# Altium PCB PCB1.PcbDoc
Units mil, origin at the board's own origin, x right, y up, seen from the top; angles counter-clockwise.
Board outline 2280 x 2275 mil, 2 copper layers (Top Layer, Bottom Layer); 42 components, 28 nets, 140 pads, 13 vias.
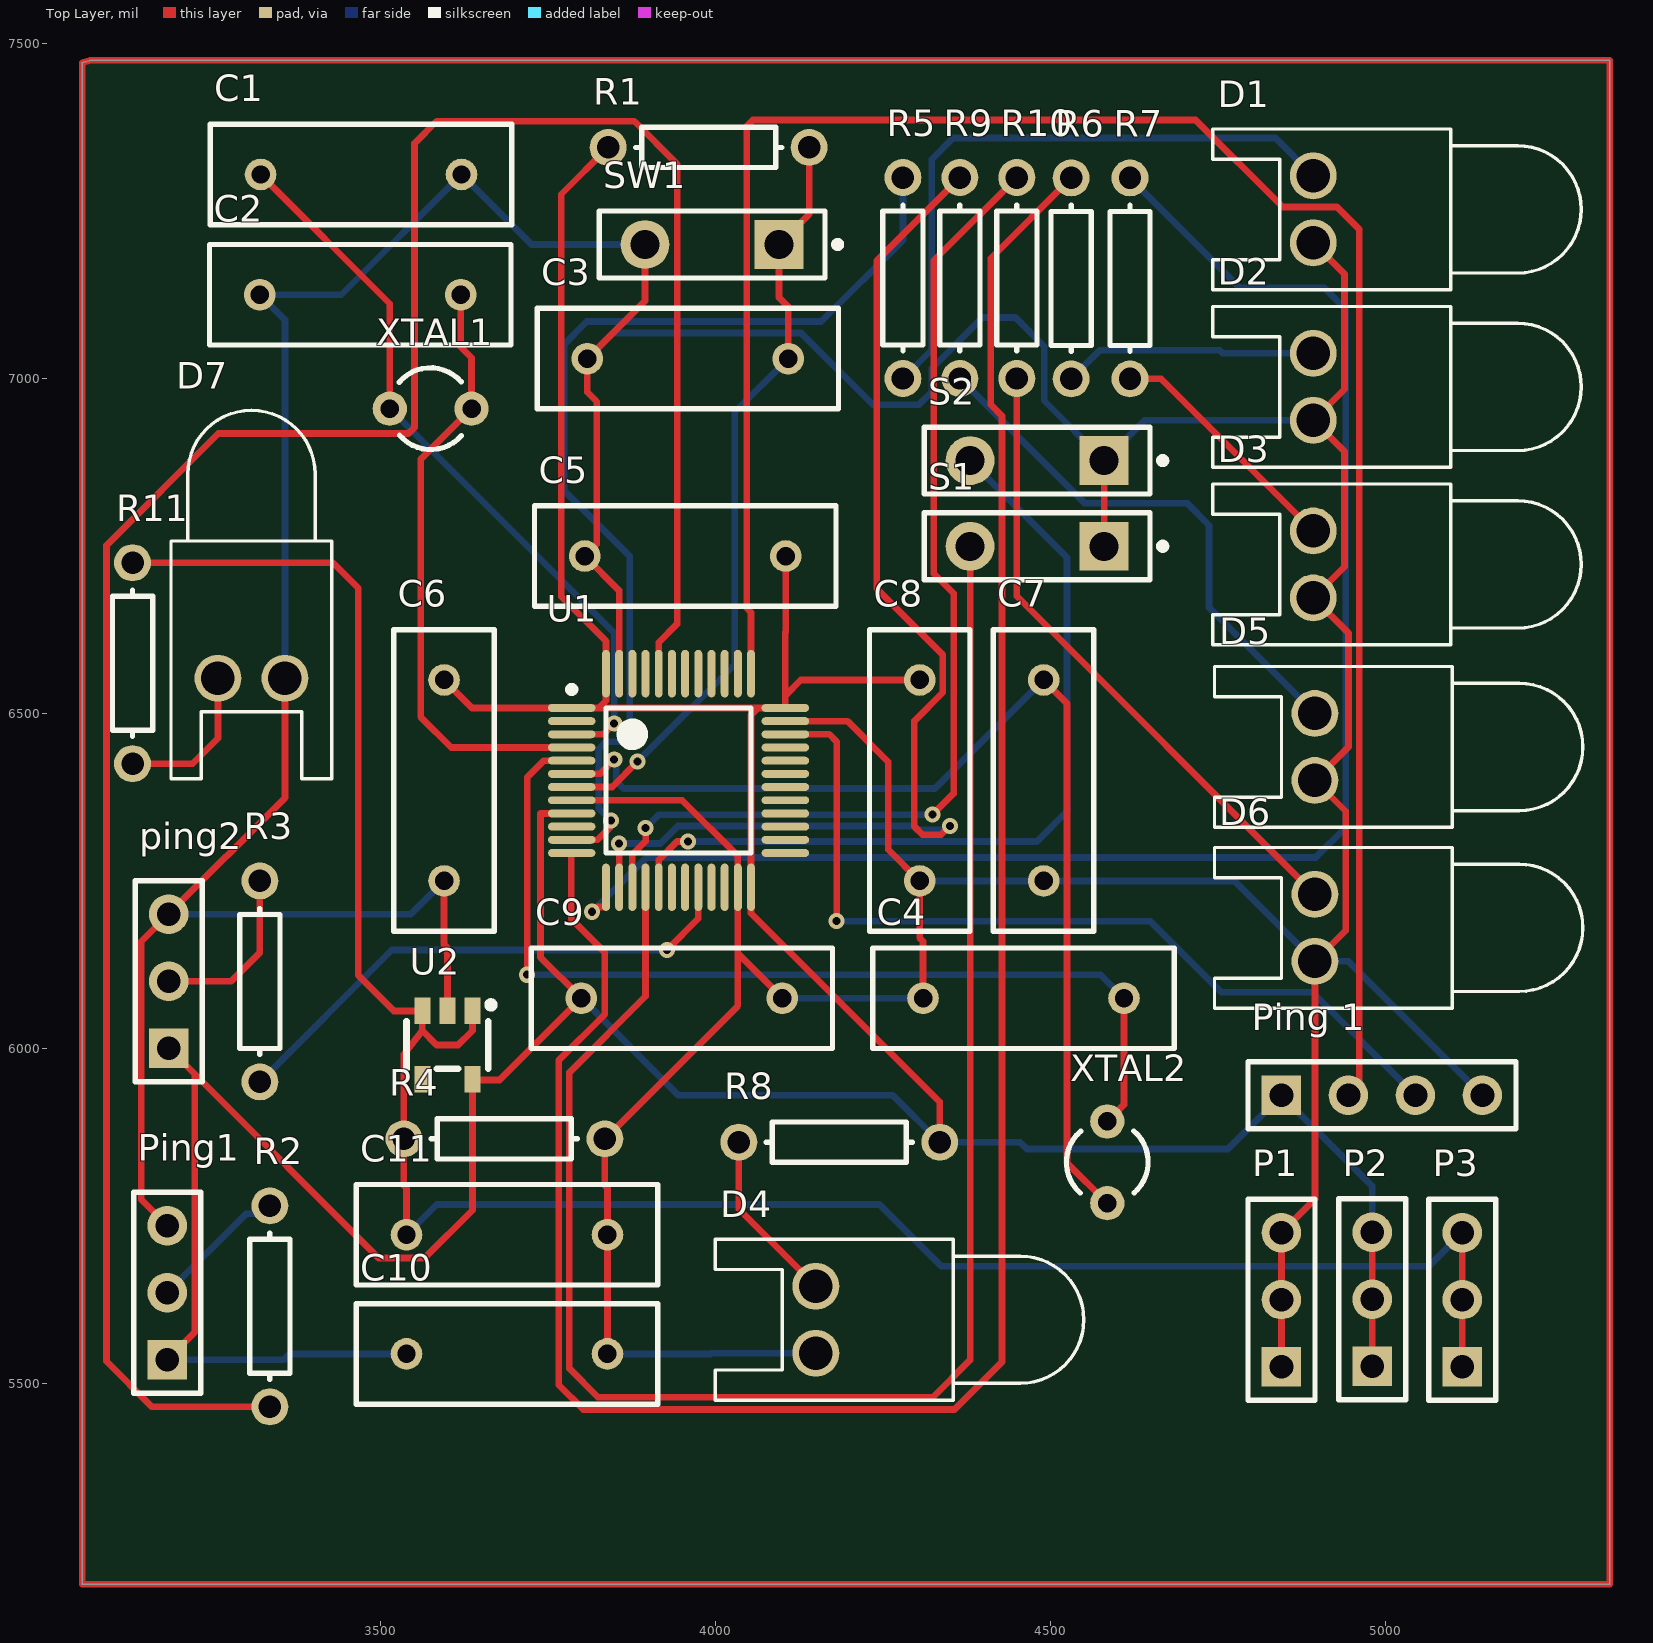
[diagram p0: Top Layer view]
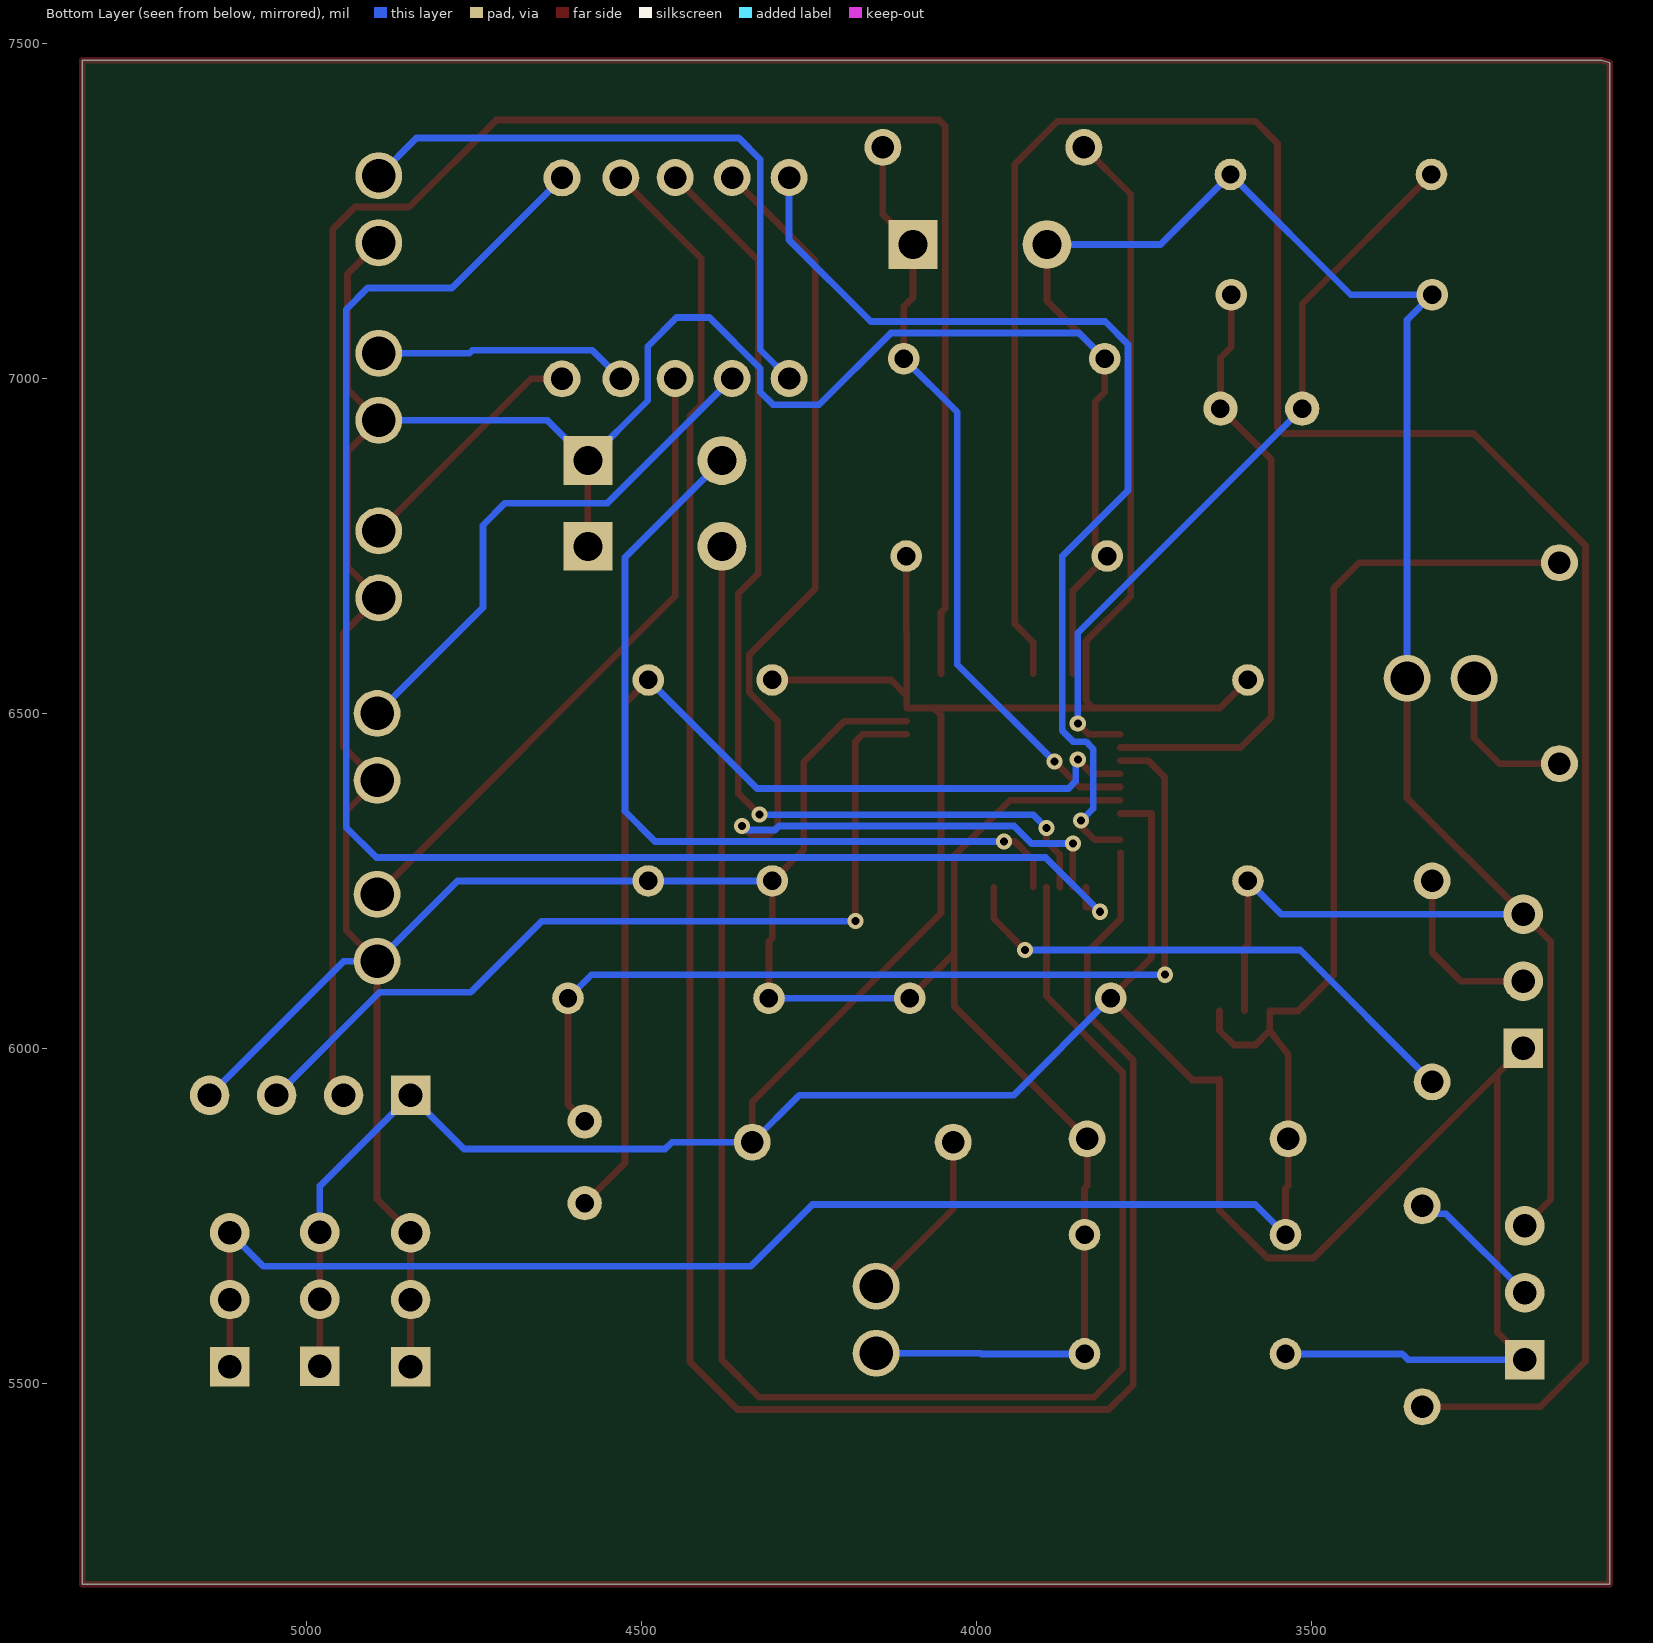
[diagram p1: Bottom Layer view, seen from below]

## Layer stack, top to bottom
Top Solder: solder mask 0.4, Solder Resist, Dk 3.5
Top Layer: signal copper 1.4
Dielectric 1: dielectric 12.6, FR-4, Dk 4.8
Bottom Layer: signal copper 1.4
Bottom Solder: solder mask 0.4, Solder Resist, Dk 3.5

## Board outline
3055,5200 3055,7471.07 3067.22,7475 5335,7475 5335,5200

## Design rules (kind name [scope] priority, off if disabled: settings)
Clearance [All] p1: gap=6 ignorepadtopadclearanceinfootprint=FALSE except(0: Arc-Hole Track-Hole SMDPad-Hole THPad-Hole Via-Hole Fill-Hole Poly-Hole Region-Hole Text-Hole)
PolygonConnect [All] p1: connectstyle=Relief reliefconductorwidth=10 reliefentries=4 polygonreliefangle="90 Angle" airgapwidth=10
RoutingVias [All] p1: holewidth=12 width=24 viastyle="Through Hole" minholewidth=12 minwidth=24 maxholewidth=12 maxwidth=24
SolderMaskExpansion [All] p1: expansion=4
Width Width_1 [All] p1: maxlimit=10 minlimit=10 preferedwidth=10
Width PWR [InNetClass('PWR')] p2: maxlimit=20 minlimit=10 preferedwidth=15 minimp=50.000000 maximp=50.000000 favimp=50.000000
30 further rules are at their usual default settings.

## Classes and differential pairs
net class PWR: 3V3 5V

## Components (designator, comment, footprint, x,y, rotation, side; value= is the part's Value field where it differs from the comment)
C1 "Cap" RAD-0.3 3471.06,7304.57 r0 top value=15pF
C2 "Cap" RAD-0.3 3470,7125 r0 top value=15pF
C3 "Cap" RAD-0.3 3958.94,7029.69 r180 top value=0.1pF
C4 "Cap" RAD-0.3 4460,6075 r180 top value=22pF
C5 "Cap" RAD-0.3 3955,6735 r0 top value=0.1uf
C6 "Cap" RAD-0.3 3595,6400 r90 top value=0.1uf
C7 "Cap" RAD-0.3 4490,6400 r90 top value=22pF
C8 "Cap" RAD-0.3 4305,6400 r90 top value=0.1uf
C9 "Cap" RAD-0.3 3950,6075 r180 top value=0.1uf
C10 "Cap" RAD-0.3 3688.94,5543.94 r180 top value=1uF
C11 "Cap" RAD-0.3 3688.94,5721.81 r180 top value=1uF
D1 "LED0" LED-0 4892.5,7252.5 r90 top
D2 "LED0" LED-0 4892.5,6987.5 r90 top
D3 "LED0" LED-0 4892.5,6722.5 r90 top
D4 "LED0" LED-0 4150,5595 r90 top
D5 "LED0" LED-0 4895,6450 r90 top
D6 "LED0" LED-0 4895,6180 r90 top
D7 "LED0" LED-0 3307.5,6552.5 r180 top
P1 "Header 3" HDR1X3 4845,5525 r90 top
P2 "Header 3" HDR1X3 4980.43,5525.43 r90 top
P3 "Header 3" HDR1X3 5115,5525 r90 top
Ping1 "Header 3" HDR1X3 3181.81,5535.43 r90 top
ping2 "Header 3" HDR1X3 3183.94,6000.43 r90 top
"Ping 1" "Header 4" HDR1X4 4845,5930 r0 top
R1 "Res1" AXIAL-0.3 3990,7345 r180 top value=1K
R2 "Res1" AXIAL-0.3 3335,5615 r90 top value=10k
R3 "Res3" AXIAL-0.3 3320,6100 r90 top value=10k
R4 "Res1" AXIAL-0.3 3685,5865 r180 top value=100K
R5 "Res1" AXIAL-0.3 4280,7150 r270 top value=10k
R6 "Res1" AXIAL-0.3 4531.06,7149.43 r270 top value=10k
R7 "Res1" AXIAL-0.3 4618.93,7149.43 r270 top value=10k
R8 "Res1" AXIAL-0.3 4185,5860 r180 top value=10k
R9 "Res1" AXIAL-0.3 4365,7150 r270 top value=10k
R10 "Res1" AXIAL-0.3 4450,7150 r270 top value=10k
R11 "Res1" AXIAL-0.3 3130,6575 r270 top value=10k
S1 "SW-PB" SPST-2 4480.31,6749.57 r180 top
S2 "SW-PB" SPST-2 4480.31,6877.45 r180 top
SW1 "SW-PB" SPST-2 3995,7200 r180 top
U1 "STM32F103C8T6" LQFP48_N 3945,6400 r0 top
U2 "RT9013-33GB" SOT-23-5_L3.0-W1.7-P0.95-LS2.8-BR 3600,6005 r90 top
XTAL1 "32.768k" R38 3575,6955 r270 top
XTAL2 "8M" R38 4585,5830 r180 top

## Footprints (in the part's own frame and the unit in brackets; to place one, negate y for a bottom-side part, rotate by r counter-clockwise, add the part's x,y. Pads: shape width x height; smd on the part's side, far side on the other; paste and mask are expansions set on the pad)
AXIAL-0.3 [mm] "Axial Device, Thru-Hole; 2 Leads; 0.3 in Pin Spacing"
  round 1.4 hole 0.85: 1(-3.81,0) 2(3.81,0)
  silkscreen extent -2.77,-0.76 2.77,0.76
HDR1X3 [mm] "Connector; Header; 3 Position"
  rect 1.5x1.5 hole 0.9: 1(0,0)
  round 1.5 hole 0.9: 2(2.54,0) 3(5.08,0)
  silkscreen extent -1.27,-1.27 6.35,1.27
HDR1X4 [mm] "Connector; Header; 4 Position"
  rect 1.5x1.5 hole 0.9: 1(0,0)
  round 1.5 hole 0.9: 2(2.54,0) 3(5.08,0) 4(7.62,0)
  silkscreen extent -1.27,-1.27 8.89,1.27
LED-0 [mil] "LED; 2 Leads"
  round 70 hole 50: 1(50,0) 2(-50,0)
  silkscreen extent -120,-400 120,150
LQFP48_N [mm] "Thin QFP, 48-Leads, Body 7x7mm, Pitch 0.5mm, IPC Medium Density"
  oval 1.8x0.3 smd: 1(-4.05,2.75) 2(-4.05,2.25) 3(-4.05,1.75) 4(-4.05,1.25) 5(-4.05,0.75) 6(-4.05,0.25) 7(-4.05,-0.25) 8(-4.05,-0.75) 9(-4.05,-1.25) 10(-4.05,-1.75) 11(-4.05,-2.25) 12(-4.05,-2.75) 25(4.05,-2.75) 26(4.05,-2.25) 27(4.05,-1.75) 28(4.05,-1.25) 29(4.05,-0.75) 30(4.05,-0.25) 31(4.05,0.25) 32(4.05,0.75) 33(4.05,1.25) 34(4.05,1.75) 35(4.05,2.25) 36(4.05,2.75)
  oval 0.3x1.8 smd: 13(-2.75,-4.05) 14(-2.25,-4.05) 15(-1.75,-4.05) 16(-1.25,-4.05) 17(-0.75,-4.05) 18(-0.25,-4.05) 19(0.25,-4.05) 20(0.75,-4.05) 21(1.25,-4.05) 22(1.75,-4.05) 23(2.25,-4.05) 24(2.75,-4.05) 37(2.75,4.05) 38(2.25,4.05) 39(1.75,4.05) 40(1.25,4.05) 41(0.75,4.05) 42(0.25,4.05) 43(-0.25,4.05) 44(-0.75,4.05) 45(-1.25,4.05) 46(-1.75,4.05) 47(-2.25,4.05) 48(-2.75,4.05)
  silkscreen extent -4.17,-2.75 2.75,3.57, body extent -3.5,-3.5 3.5,3.5, height 1.6
R38 [mm] "Crystal, Thru-Hole; 2 Leads; Body 3.1 x 8.2 mm (Dia.xH)"
  round 1.3 hole 0.7: 1(0,1.55) 2(0,-1.55)
  silkscreen extent -1.55,-1.19 1.55,1.17
RAD-0.3 [mm] "Radial Cap, Thru-Hole; 2 Leads; 0.3 in Pin Spacing"
  round 1.2 hole 0.7: 1(-3.81,0) 2(3.81,0)
  silkscreen extent -5.71,-1.9 5.72,1.91
SOT-23-5_L3.0-W1.7-P0.95-LS2.8-BR [mm]
  rect 1x0.6 smd: 1(1.3,-0.95) 2(1.3,0) 3(1.3,0.95) 4(-1.3,0.95) 5(-1.3,-0.95)
  silkscreen extent -0.9,-1.78 1.65,1.55
SPST-2 [mm] "Switch; 2 Leads"
  rect 1.85x1.85 hole 1.1: 1(-2.54,0)
  round 1.85 hole 1.1: 2(2.54,0)
  silkscreen extent -4.89,-1.27 4.28,1.27

## Part data
C1 C2 C3 C4 C5 C6 C7 C8 C9 C10 C11: "Capacitor", LatestRevisionDate=17-Jul-2002, LatestRevisionNote="Re-released for DXP Platform.", PackageDescription="Radial Cap, Thru-Hole; 2 Leads; 0.3 in Pin Spacing", PackageReference=RAD-0.3, Published=8-Jun-2000, Publisher="Altium Limited"
D1 D2 D3 D4 D5 D6 D7: "Typical INFRARED GaAs LED", LatestRevisionDate=08-Jul-2005, LatestRevisionNote="Mech Layer 1 removed.", PackageDescription="LED; 2 Leads", PackageReference=LED-0, Published=8-Jun-2000, Publisher="Altium Limited"
P1 P2 P3 Ping1 ping2: "Header, 3-Pin", LatestRevisionDate=17-Jul-2002, LatestRevisionNote="Re-released for DXP Platform.", Publisher="Altium Limited"
"Ping 1": "Header, 4-Pin", LatestRevisionDate=17-Jul-2002, LatestRevisionNote="Re-released for DXP Platform.", Publisher="Altium Limited"
R1 R2 R4 R5 R6 R7 R8 R9 R10 R11: "Resistor", LatestRevisionDate=17-Jul-2002, LatestRevisionNote="Re-released for DXP Platform.", PackageDescription="Axial Device, Thru-Hole; 2 Leads; 0.3 in Pin Spacing", PackageReference=AXIAL-0.3, Published=8-Jun-2000, Publisher="Altium Limited"
R3: library part Res1, "Resistor", LatestRevisionDate=17-Jul-2002, LatestRevisionNote="Re-released for DXP Platform.", PackageDescription="Axial Device, Thru-Hole; 2 Leads; 0.3 in Pin Spacing", PackageReference=AXIAL-0.3, Published=8-Jun-2000, Publisher="Altium Limited"
S1 S2 SW1: "Switch", LatestRevisionDate=17-Jul-2002, LatestRevisionNote="Re-released for DXP Platform.", PackageDescription="Switch; 2 Leads", PackageReference=SPST-2, Published=24-Mar-1999, Publisher="Altium Limited"
U1: "STM32 ARM-based 32-bit MCU with 64 Kbytes Flash, 48-pin LQFP, Industrial Temperature", ComponentLink1Description="Manufacturer Link", ComponentLink1URL=www.st.com/stm32, ComponentLink2Description=Datasheet, ComponentLink2URL=http://www.st.com/stonline/products/literature/ds/13587.pdf, DatasheetVersion="rev6, Mar-2008", PackageDescription="48-Pin Low-Profile Quad Flat Pack, 7 x 7 mm Body, 0.5 mm Pitch (LQFP48)", PackageReference=LQFP48, PackageVersion=Mar-2008, Published=30-May-2008, Publisher="Altium Limited"
U2: BOM_JLCPCB Part Class="Extended Part", BOM_Manufacturer=RICHTEK, BOM_Manufacturer Part=RT9013-33GB, BOM_Supplier=LCSC, BOM_Supplier Part=C47773, spicePre=U, spiceSymbolName=RT9013-33GB
XTAL1 XTAL2: library part XTAL, "Crystal Oscillator", LatestRevisionDate=17-Jul-2002, LatestRevisionNote="Re-released for DXP Platform.", PackageDescription="Crystal, Thru-Hole; 2 Leads; Body 3.1 x 8.2 mm (Dia.xH)", PackageReference=R38, Published=8-Jun-2000, Publisher="Altium Limited"

## Via types
v1: diameter 24, hole 12, Top Layer to Bottom Layer, 13 vias

## Nets (pads, with @x,y where several pads share a name; then routed paths per layer and width w, separated by ;. In a path a pad name is that pad's centre, name@x,y a point inside that pad or via, vN(x,y) a via of type N, cw(c..) or ccw(c..) an arc to the next point about the centre after c; other vN are vias at no path point)
3V3: "Ping 1.1" C5.2 C6.2 C8.2 C9.2 C10.2 P2.1 P2.2 P2.3 Ping1.1 ping2.1 R1.2 R8.1 U1.1 U1.9 U1.24 U1.36 U1.48 U2.5 | length 6435.7
  Top Layer w10: Ping1.1 3223,5576.61 3223,5961.36 ; ping2.1 3223,5961.36 ; C6.2 3636.73,6508.27 U1.1 3826,6508.27 ; U2.5 U2.5@3637.4,5953 ; U1.9 3739,6350.79 3739,6136 C9.2 3678,5953 U2.5@3637.4,5953 ; R1.2 3770,7275 3770,6674.73 3836.73,6608 U1.48 3836.73,6519 3826,6508.27 ; C5.2 4105,6621.55 4104.45,6621 4104.45,6527 ; C8.2 4127.45,6550 4104.45,6527 ; R8.1 4335,5920 4053.27,6201.73 U1.24 4053.27,6497.54 4064,6508.27 ; P2.1 P2.2 P2.3 ; 3223,5961.36 3497.36,5687 3566,5687 3637.4,5758.4 U2.5@3637.4,5953 ; 3826,6508.27 4064,6508.27 ; 4064,6508.27 U1.36 4104.45,6527
  Bottom Layer w10: Ping1.1 3356,5535.43 3364.51,5543.94 C10.2 ; C9.2 3945,5930 4265,5930 R8.1 4455,5860 4465,5850 4765,5850 4845,5930 4980.43,5794.57 P2.3
5V: C11.2 P3.1 P3.2 P3.3 R4.2 R11.1 U2.1 U2.3 | length 3369.7
  Top Layer w10: R11.1 3429,6725 3467,6687 3467,6109 3520,6056 U2.3@3562.6,6056 ; C11.2 3538.94,5791 3535,5794.94 R4.2 3535,5991 3562.6,6026.4 ; U2.3 U2.3@3562.6,6056 ; U2.1 3637.4,6026.4 3616,6005 3584,6005 3562.6,6026.4 ; P3.1 P3.2 P3.3 ; 3562.6,6026.4 U2.3@3562.6,6056
  Bottom Layer w10: C11.2 3584.13,5767 4245,5767 4337,5675 5065,5675 P3.3
BOOT0: R2.1 U1.44 | length 3651.2
  Top Layer w10: R2.1 3159,5465 3091,5533 3091,6751 3258,6918 3542,6918 3551,6927 3551,7351 3584,7384 3879,7384 3943,7320 3943,6633.53 3915.47,6606 U1.44
BOOT1: R3.1 U1.20 | length 802.1
  Top Layer w10: v1(3927.53,6147) 3974.53,6194 U1.20
  Bottom Layer w10: R3.1 3517,6147 v1(3927.53,6147)
KET2: S2.2 U1.17 | length 1263.9
  Top Layer w10: U1.17 3915.47,6281.47 3943,6309 v1(3959,6309)
  Bottom Layer w10: v1(3959,6309) 4480,6309 4525,6354 4525,6732.76 S2.2
KEY1: S1.2 U1.16 | length 2619.3
  Top Layer w10: U1.16 3895.79,6077.79 3782,5964 3782,5522 3824.69,5479.31 4324.63,5479.31 4380.31,5535 S1.2
LB1: "Ping 1.4" C1.2 C2.1 C3.2 C4.2 C5.1 C6.1 C7.1 C8.1 C9.1 C10.1 C11.1 D1.2 D2.2 D3.2 D4.2 D5.2 D6.2 D7.2 P1.1 P1.2 P1.3 Ping1.3 ping2.3 R4.1 S1.1 S2.1 SW1.2 U1.8 U1.23 U1.35 U1.47 U2.2 | length 10154.2
  Top Layer w10: Ping1.3 3143,5774.24 3143,6159.49 ping2.3 3357.5,6373.99 D7.2 ; C6.1 3595,6155 3600,6150 U2.2 ; U1.8 3950.11,6370.47 4033.58,6287 U1.23 4033.58,6141.42 ; C10.1 C11.1 3838.94,5791 3835,5794.94 R4.1 4033.58,6063.58 4033.58,6141.42 ; U1.47 3856.42,6683.58 C5.1 3822.97,6752.97 3822.97,6965.5 3808.94,6979.53 C3.2 3895,7115.75 SW1.2 ; C9.1 4033.58,6141.42 ; U1.35 4197,6488.58 4258,6427.58 4258,6297 C8.1 4305,6165 4310,6160 C4.2 ; S1.1 S2.1 ; P1.1 P1.2 P1.3 4895,5775 D6.2 4941,6176 4941,6354 D5.2 4945,6450 4945,6620 D3.2 4939,6719 4939,6891 D2.2 4939,6984 4939,7156 D1.2
  Bottom Layer w10: ping2.3 3545.43,6200.43 C6.1 ; D7.2 3357.5,7087.5 C2.1 3441.5,7125 C1.2 3725.63,7200 SW1.2 ; C3.2 3847.25,7068 4128,7068 4235,6961 4304,6961 4323,6980 4323,7015 4399,7091 4448,7091 4491,7048 4491,6966.76 S2.1 4640.37,6937.5 D2.2 ; C10.1 3993,5543.94 3994.06,5545 D4.2 ; C9.1 C4.2 ; C8.1 C7.1 4775,6250 D6.2 4945,6130 5145,5930
NetD1_1: D1.1 R5.2 | length 951
  Bottom Layer w10: R5.2 4323,7043 4323,7327 4355,7359 4836,7359 D1.1
NetD2_1: D2.1 R6.2 | length 380.9
  Bottom Layer w10: R6.2 4573.62,7042 4753,7042 4757.5,7037.5 D2.1
NetD3_1: D3.1 R7.2 | length 367.6
  Top Layer w10: R7.2 4665.57,6999.43 D3.1
NetD4_1: D4.1 R8.2 | length 262.6
  Top Layer w10: R8.2 4035,5760 D4.1
NetD5_1: D5.1 R9.2 | length 809.2
  Bottom Layer w10: R9.2 4551,6814 4704,6814 4737,6781 4737,6658 D5.1
NetD6_1: D6.1 R10.2 | length 954.3
  Top Layer w10: R10.2 4450,6675 D6.1
NetD7_1: D7.1 R11.2 | length 232.7
  Top Layer w10: R11.2 3219.5,6425 3257.5,6463 D7.1
NetPing1_2: Ping1.2 R2.2 | length 213.9
  Bottom Layer w10: Ping1.2 3299.39,5753 3335,5753 R2.2
Netping2_2: ping2.2 R3.2 | length 260.7
  Top Layer w10: ping2.2 3277.43,6100.43 3320,6143 R3.2
NRST: C3.1 R1.1 SW1.1 U1.7 | length 1148.6
  Top Layer w10: U1.7 3846,6390.16 v1(3884,6428.16) ; C3.1 4108.94,7107 4095,7120.94 SW1.1 4140,7245 R1.1
  Bottom Layer w10: v1(3884,6428.16) 4029,6573.16 4029,6949.75 C3.1
OSC32_IN: C1.1 U1.3 XTAL1.2 | length 1108.4
  Top Layer w10: C1.1 3513.98,7111.66 XTAL1.2 ; U1.3 3833,6468.9 v1(3849,6484.9)
  Bottom Layer w10: XTAL1.2 3849,6619.98 v1(3849,6484.9)
OSC32_OUT: C2.2 U1.4 XTAL1.1 | length 912.6
  Top Layer w10: C2.2 3620,7047.02 3636.02,7031 XTAL1.1 3560,6878.98 3560,6495 3605.79,6449.21 U1.4
OSC_INPD0: C4.1 U1.5 XTAL2.2 | length 1471.3
  Top Layer w10: v1(3719,6110) 3719,6404.53 3744,6429.53 U1.5 ; XTAL2.2 4610,5916.02 C4.1
  Bottom Layer w10: v1(3719,6110) 4575,6110 C4.1
OSC_OUTPD0: C7.2 U1.6 XTAL2.1 | length 1635.5
  Top Layer w10: U1.6 3827.84,6409.84 v1(3849,6431) ; C7.2 4525,6515 4525,5828.98 XTAL2.1
  Bottom Layer w10: v1(3849,6431) 3852,6428 3852,6399 3863,6388 4328,6388 C7.2
PA1: R5.1 U1.11 | length 1528.2
  Top Layer w10: U1.11 3824,6311.42 3844,6331.42 v1(3844,6340)
  Bottom Layer w10: v1(3844,6340) 3826,6358 3826,6447 3837,6458 3856,6458 3872,6474 3872,6735 3774,6833 3774,7051 3808,7085 4158,7085 4280,7207 R5.1
PA2: R6.1 U1.12 | length 3374.5
  Top Layer w10: U1.12 3785,6291.73 3785,6193 3835,6143 3835,6051 3766,5982 3766,5498 3803,5461 4357,5461 4428,5532 4428,6944 4411,6961 4411,7179.38 R6.1
PA3: R7.1 U1.13 | length 2406.8
  Top Layer w10: v1(3816,6204) 3823,6211 3836.73,6211 U1.13
  Bottom Layer w10: v1(3816,6204) 3897,6285 4896,6285 4941,6330 4941,7103 4909,7135 4783.36,7135 R7.1
PA4: R9.1 U1.14 | length 1717
  Top Layer w10: U1.14 v1(3856.42,6306) ; v1(4350,6332) 4337,6319 4309,6319 4297,6331 4297,6489 4339.62,6531.62 4339.62,6587.38 4241,6686 4241,7176 R9.1
  Bottom Layer w10: v1(3856.42,6306) 3918,6306 3944,6332 4295,6332 4301,6326 4344,6326 v1(4350,6332)
PA5: R10.1 U1.15 | length 1560.8
  Top Layer w10: U1.15 3876.1,6289.45 3896,6309.35 v1(3896,6329.1) ; v1(4324,6349) 4355.62,6380.62 4355.62,6679.38 4326,6709 4326,7176 R10.1
  Bottom Layer w10: v1(3896,6329.1) 3915.9,6349 v1(4324,6349)
SWDCLK: "Ping 1.2" U1.37 | length 3105
  Top Layer w10: U1.37 4053.27,6650.73 4047,6657 4047,7377 4056,7386 4717,7386 4847,7256 4928,7256 4961,7223 4961,5946 4945,5930
SWDIO: "Ping 1.3" U1.34 | length 1320.8
  Top Layer w10: U1.34 4170.1,6468.9 4181,6458 v1(4181,6190)
  Bottom Layer w10: v1(4181,6190) 4649,6190 4755,6084 4891,6084 5045,5930
pads on no net: U1.2 U1.10 U1.18 U1.19 U1.21 U1.22 U1.25 U1.26 U1.27 U1.28 U1.29 U1.30 U1.31 U1.32 U1.33 U1.38 U1.39 U1.40 U1.41 U1.42 U1.43 U1.45 U1.46 U2.4
copper on no net: | length 9106.7
  Top Layer w10: 3055,5200 5335,5200 5335,7475 5050,7475 4920,7475 4395,7475 3067.22,7475 3055,7471.07 3055,7105 3055,5200

## Silkscreen, mask and mechanical layers (free items; w line width, h text height)
Mechanical 1:
  text "STM32_MINI_System_pepinot" at 3165,5290 h60
Mechanical 15:
  lines w10: 2130,9535 2130,7475 2135,7480 4370,7480 4370,9535 2160,9535 2135,9535